# Altium PCB PlanerInductor2.PcbDoc
Units mil, origin at the board's own origin, x right, y up, seen from the top; angles counter-clockwise.
Board outline 6000 x 4000 mil, 6 copper layers (Top Layer, Mid-Layer 1, Mid-Layer 2, Mid-Layer 3, Mid-Layer 4, Bottom Layer); 19 components, 0 nets, 38 pads, 105 vias.
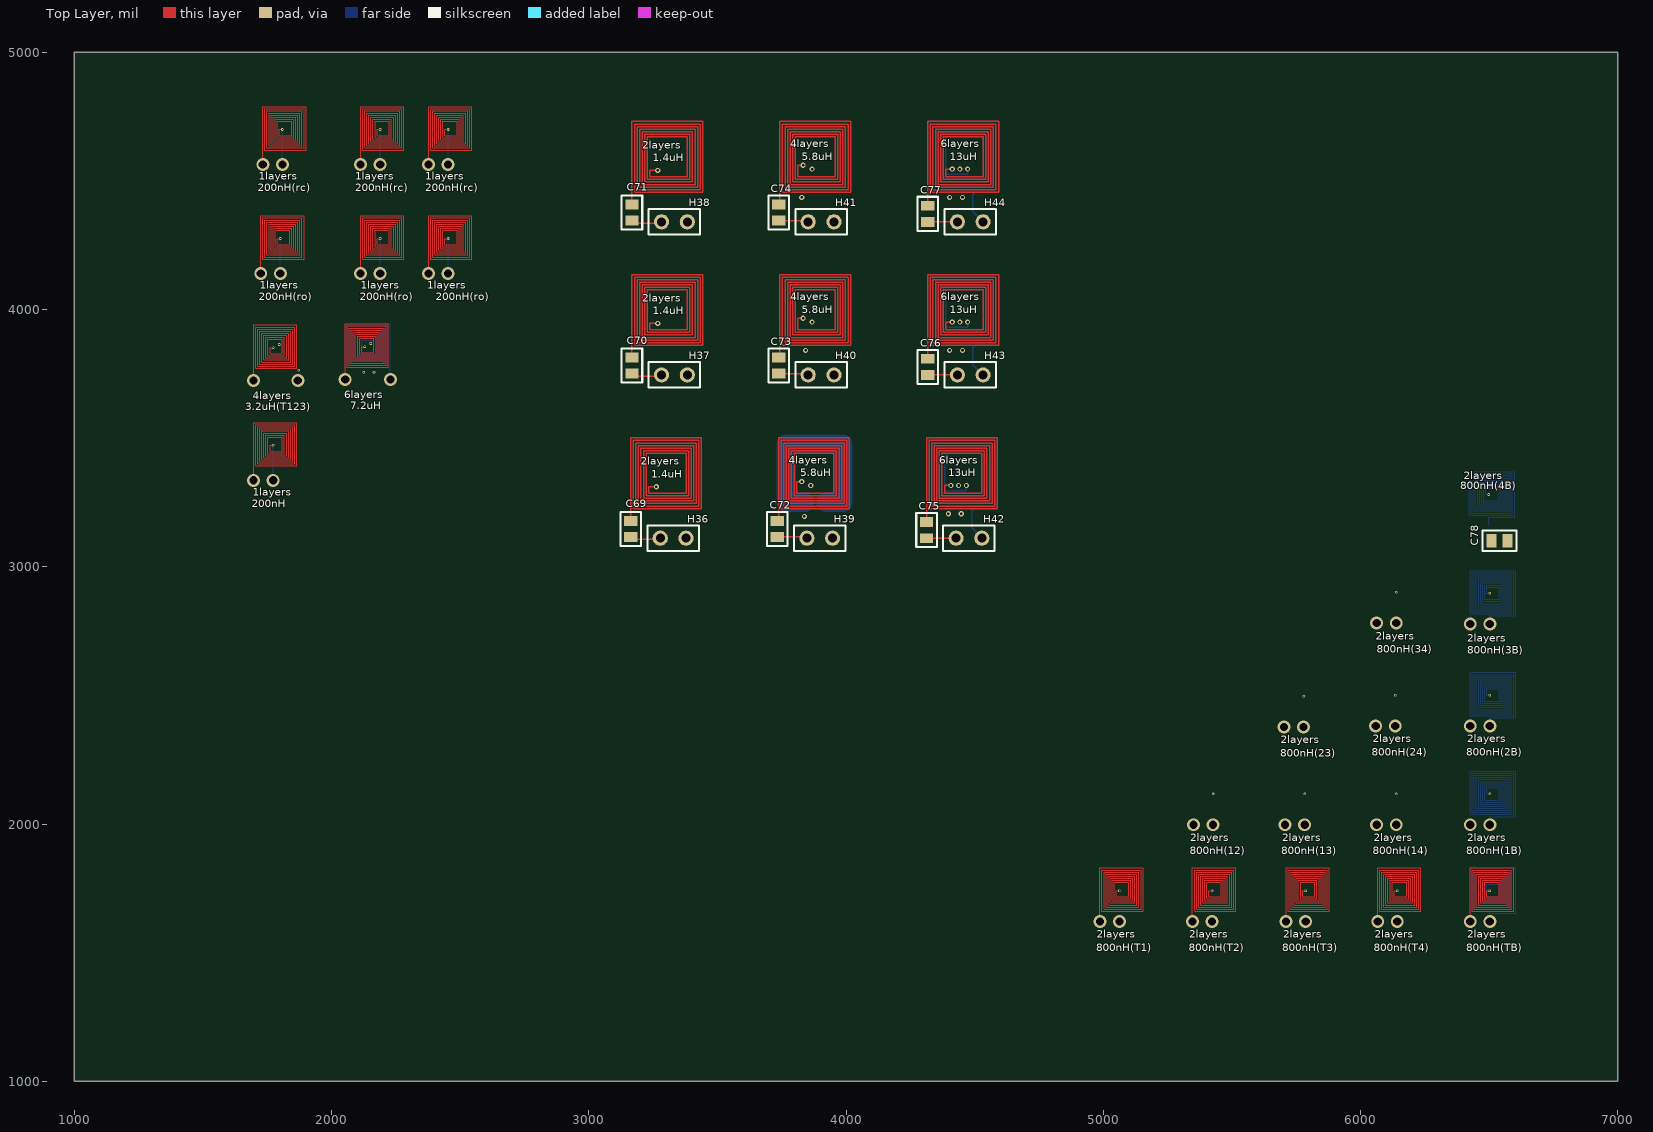
[diagram p0: Top Layer view]
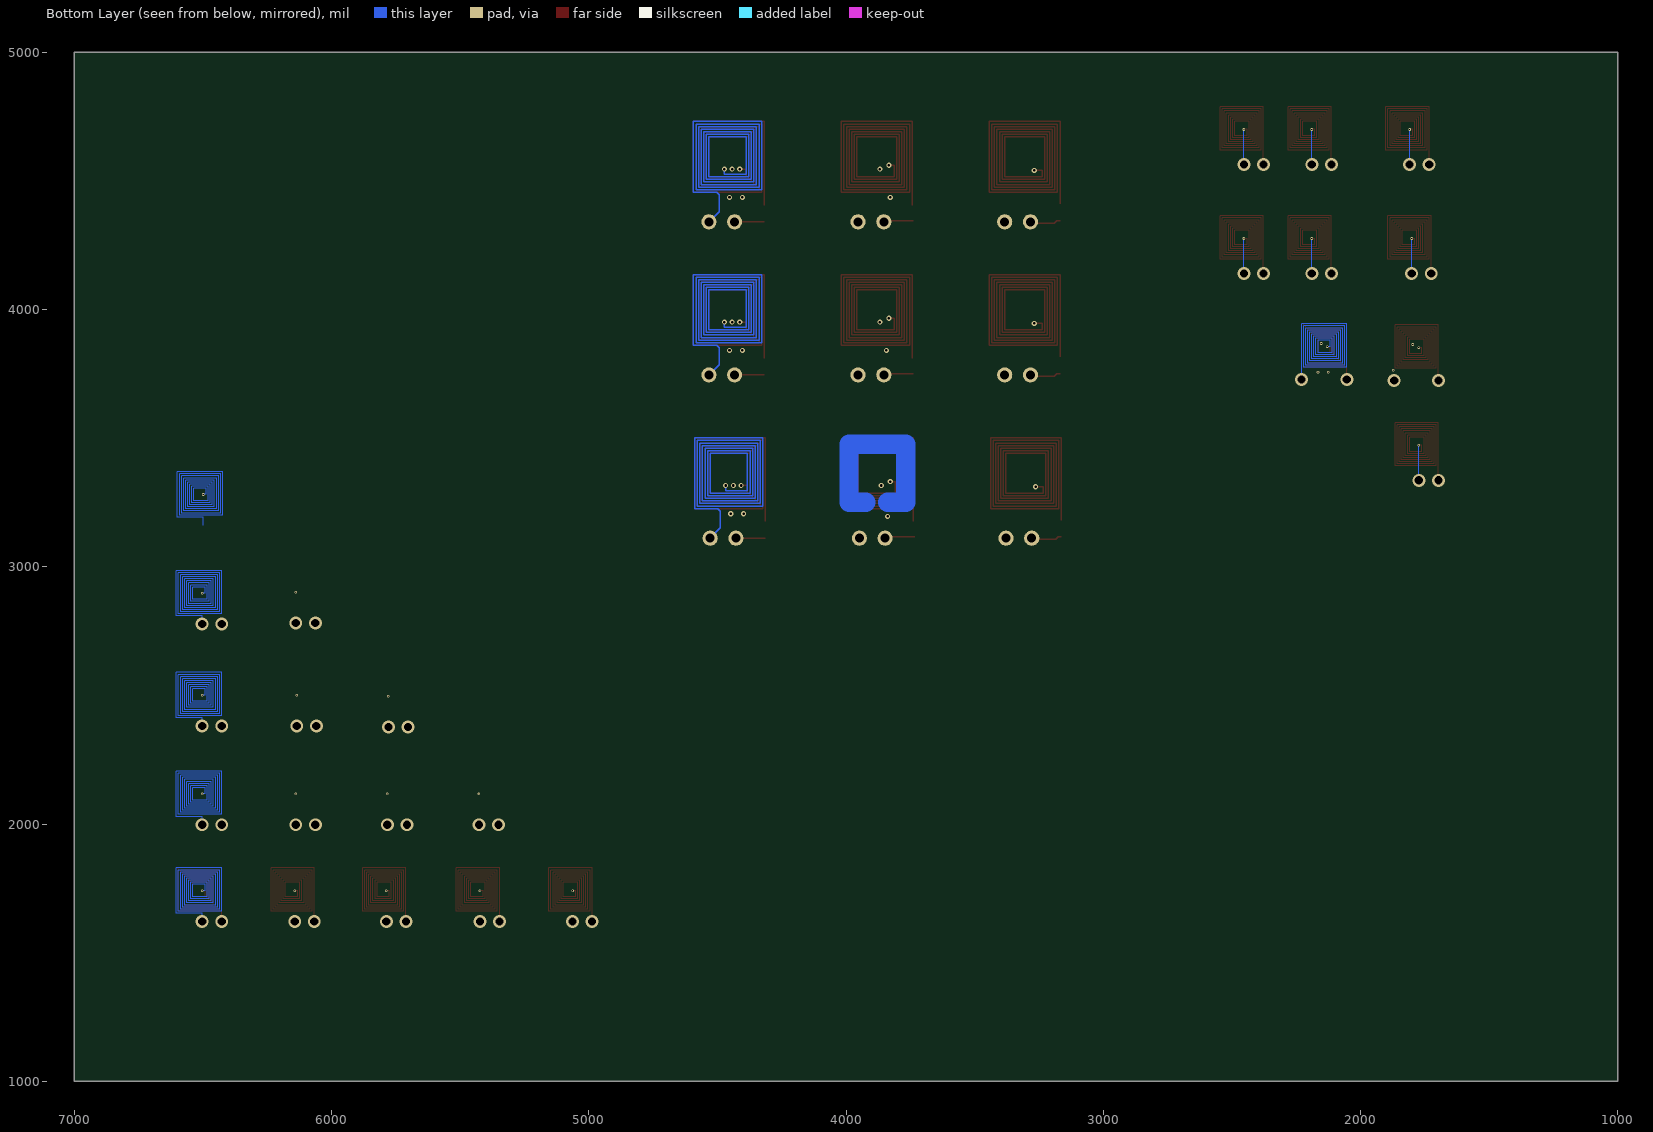
[diagram p1: Bottom Layer view, seen from below]
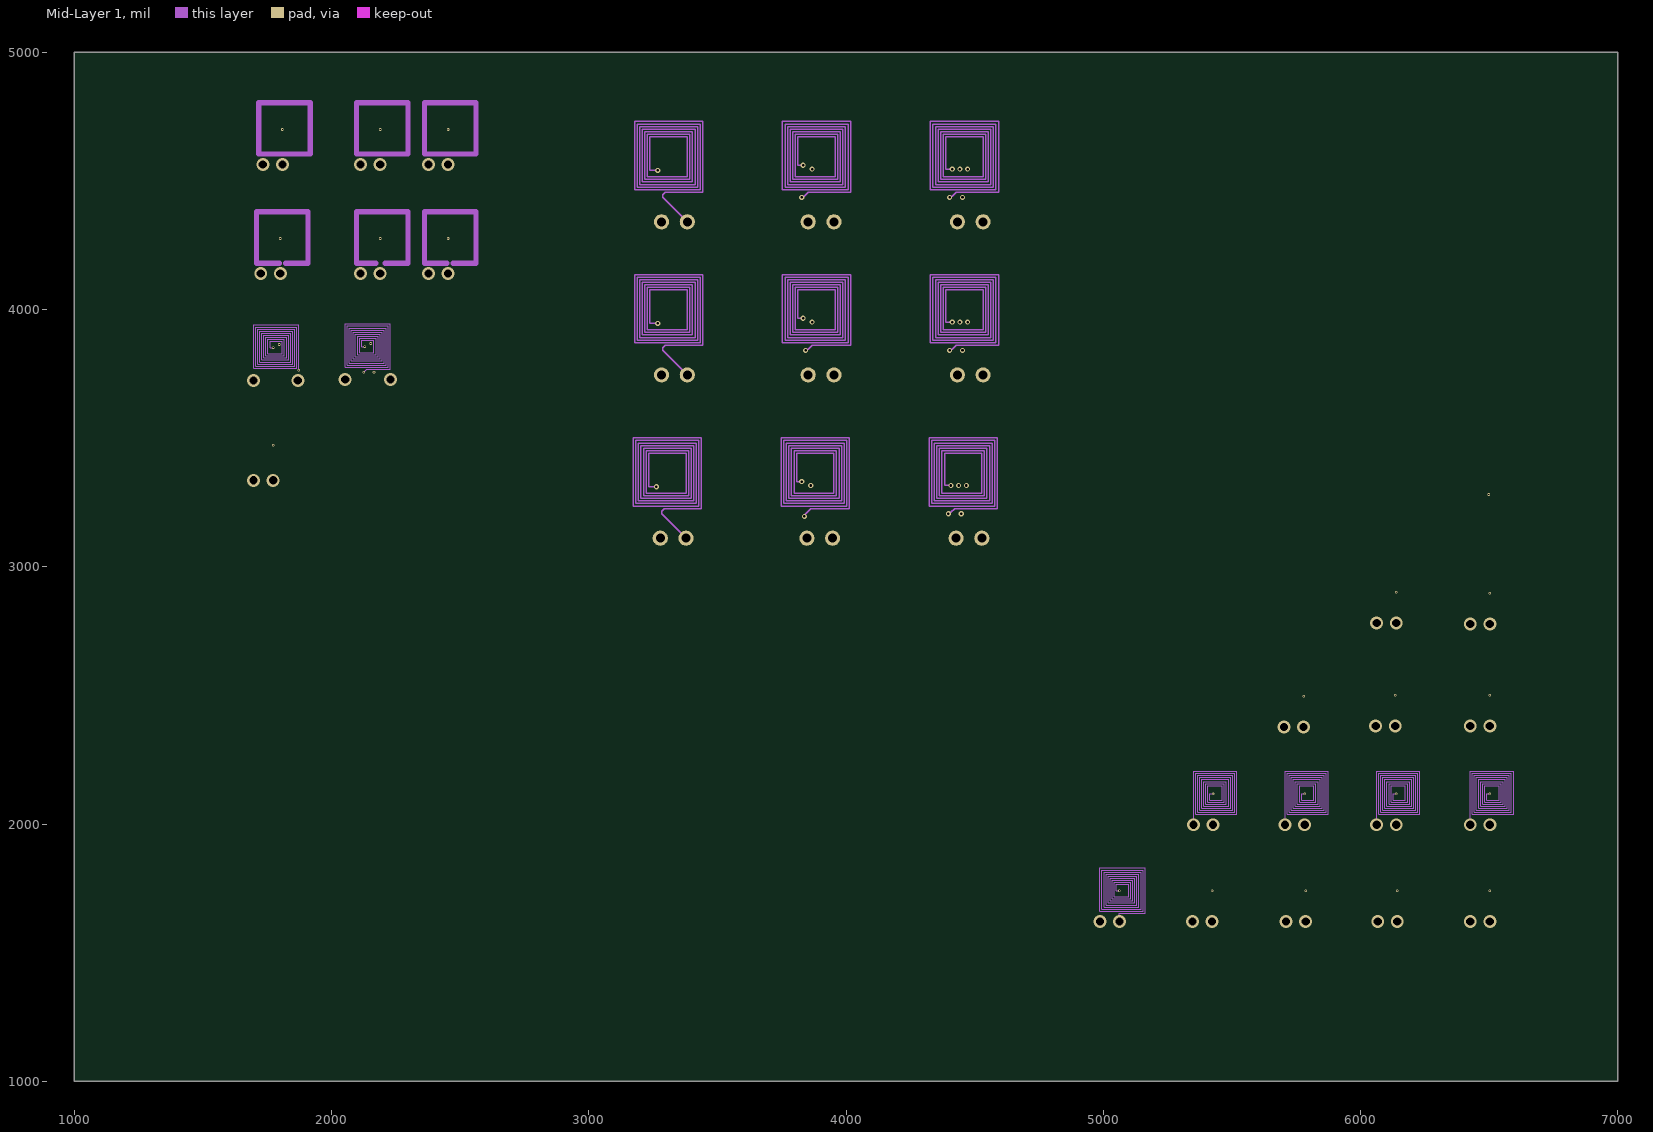
[diagram p2: Mid-Layer 1]
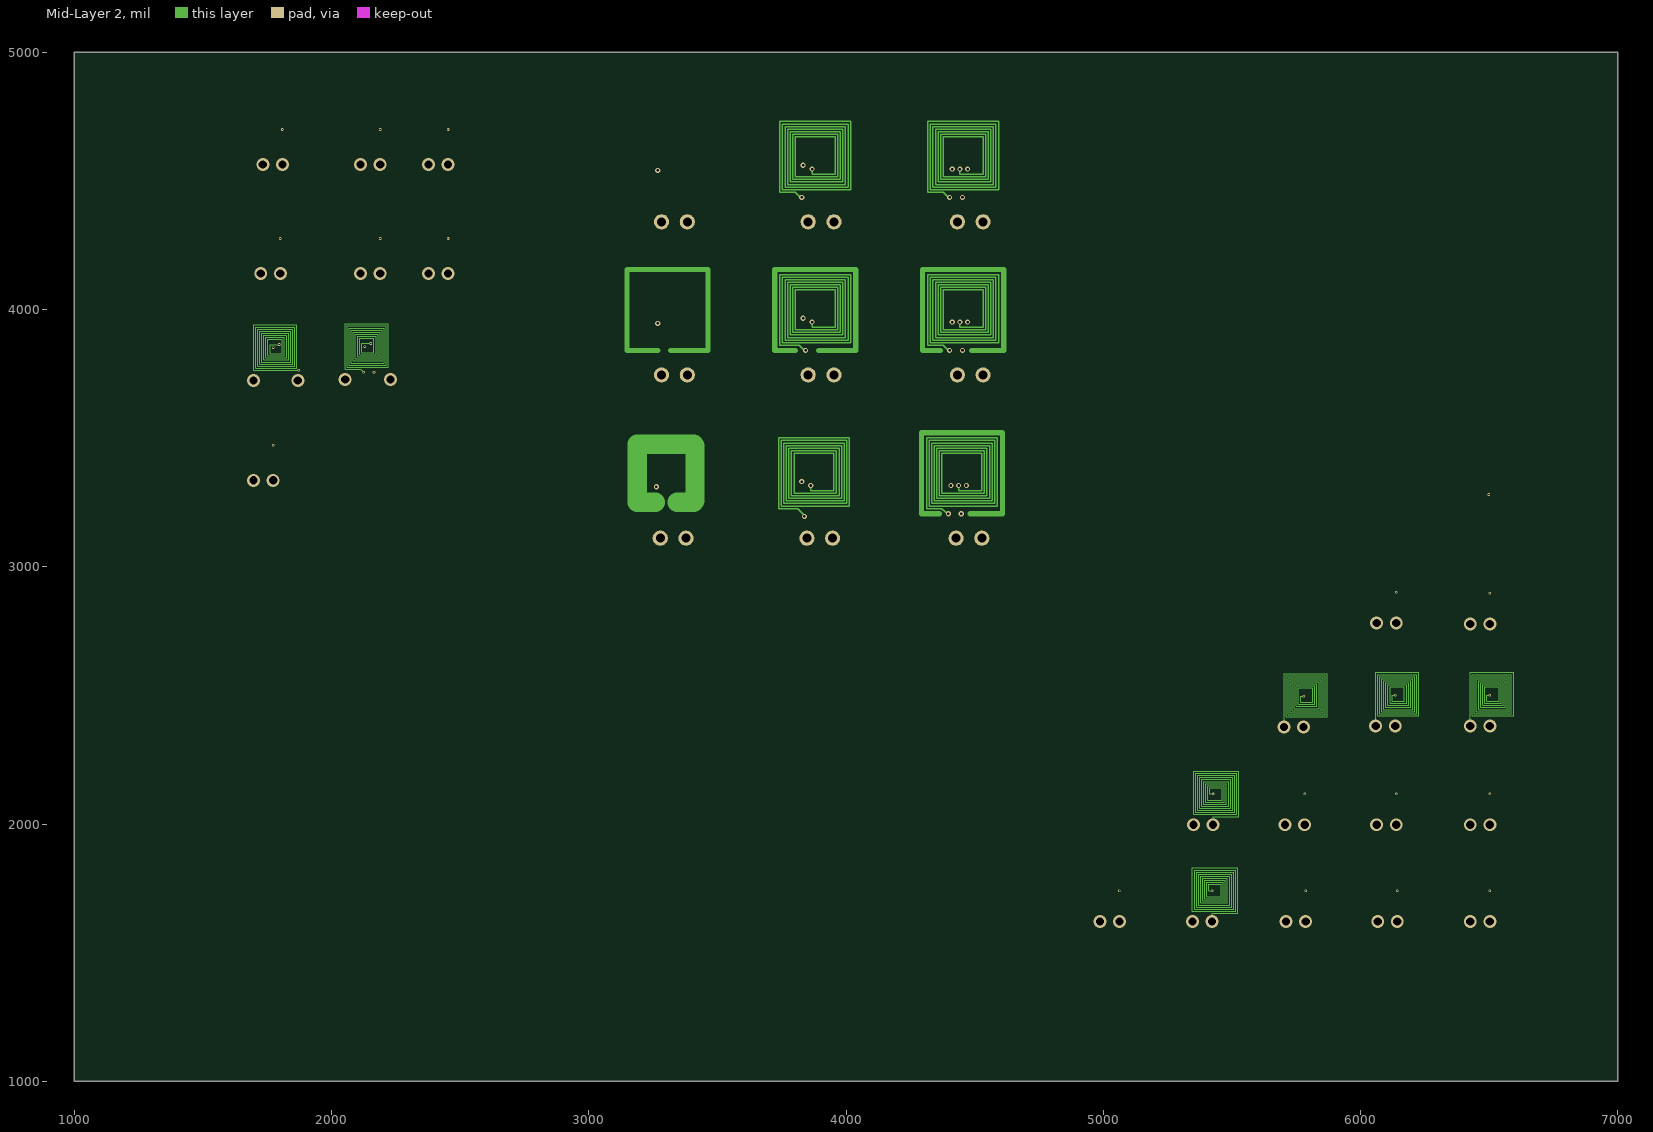
[diagram p3: Mid-Layer 2]
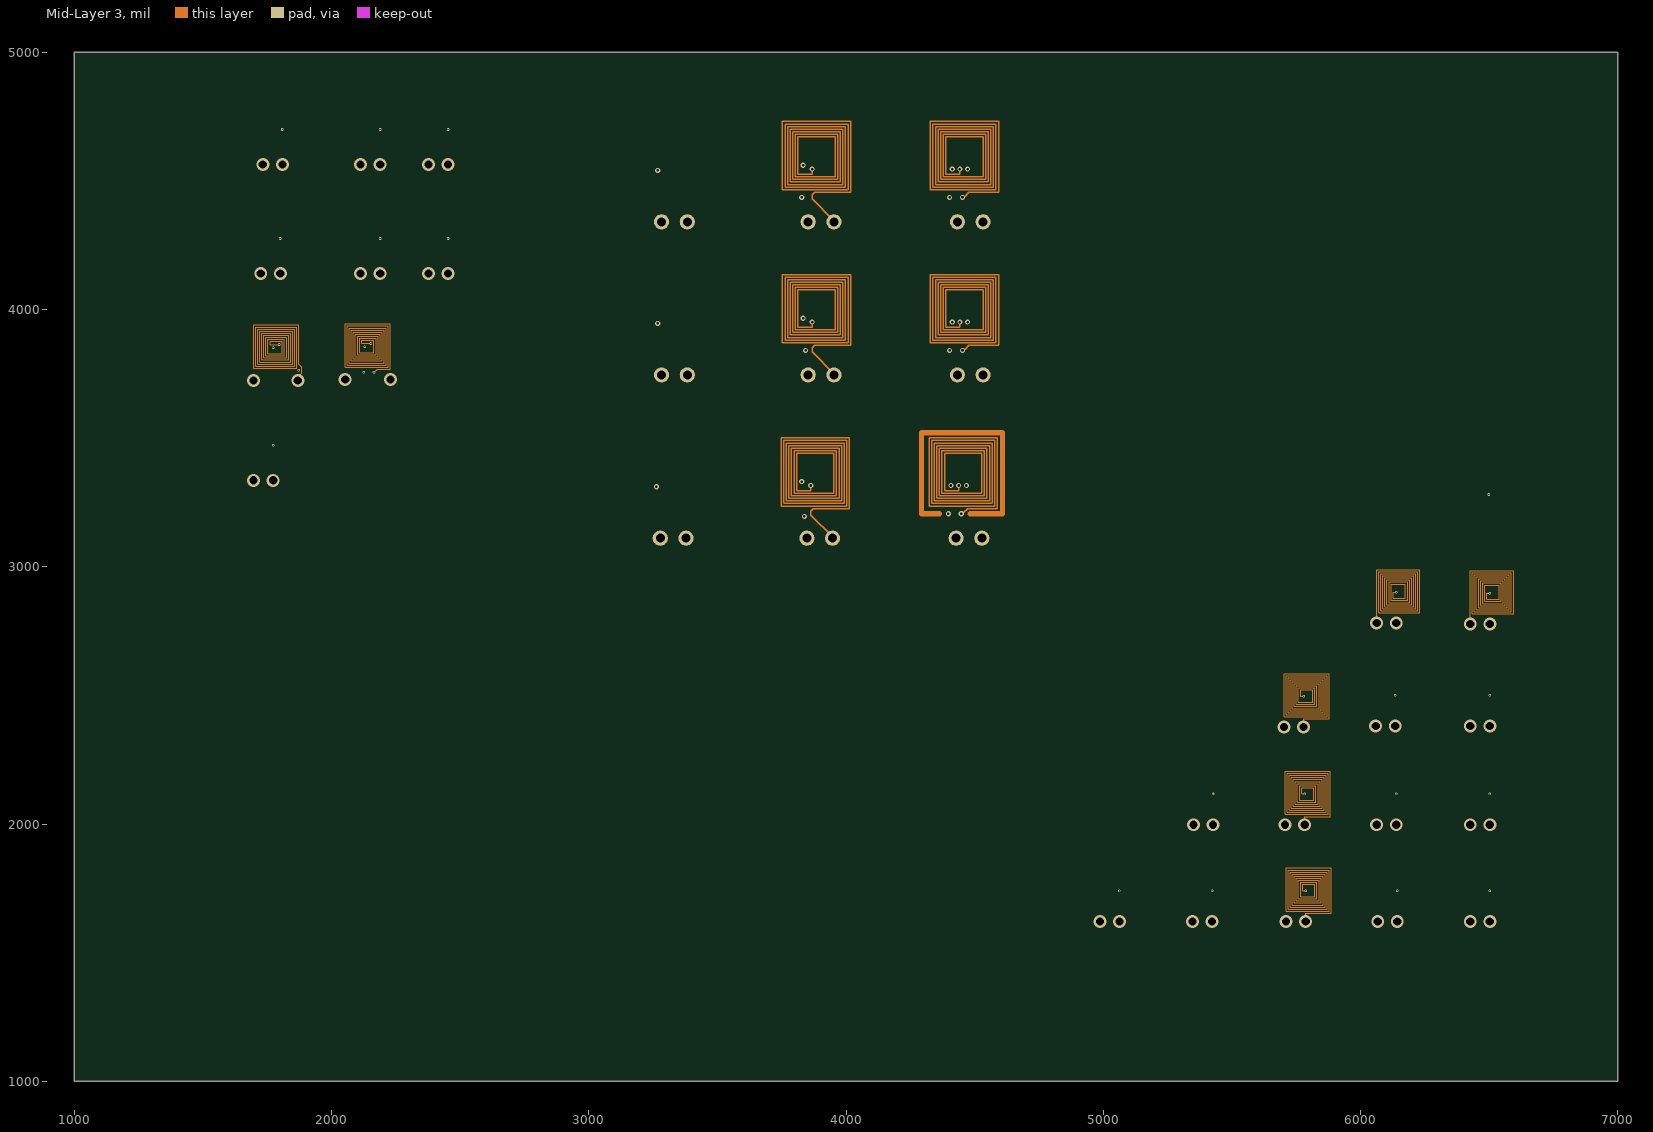
[diagram p4: Mid-Layer 3]
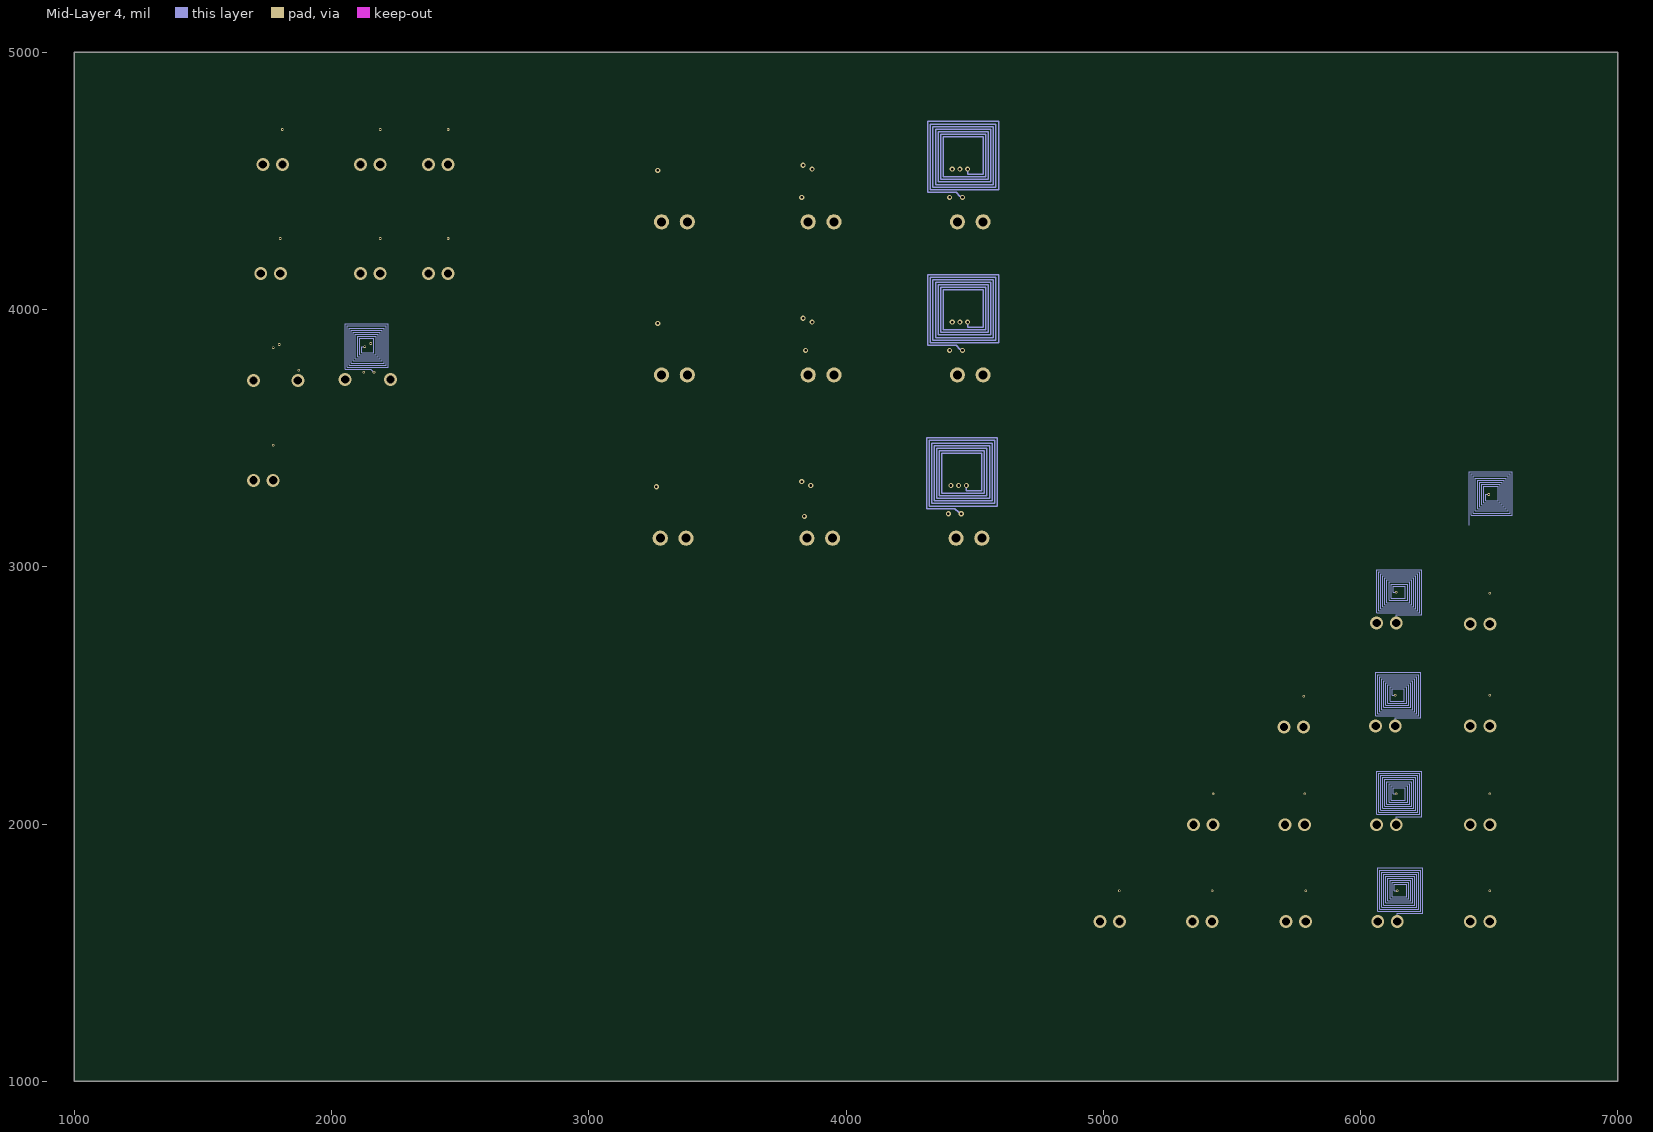
[diagram p5: Mid-Layer 4]

## Layer stack, top to bottom
Top Layer: signal copper 1.4
Dielectric: dielectric 12.6, FR-4, Dk 4.8
Mid-Layer 1: signal copper 1.4
Dielectric: dielectric 12.6, FR-4, Dk 4.8
Mid-Layer 2: signal copper 1.4
Dielectric: dielectric 12.6, FR-4, Dk 4.8
Mid-Layer 3: signal copper 1.4
Dielectric: dielectric 12.6, FR-4, Dk 4.8
Mid-Layer 4: signal copper 1.4
Dielectric: dielectric 12.6, FR-4, Dk 4.8
Bottom Layer: signal copper 1.4

## Board outline
1000,1000 7000,1000 7000,5000 1000,5000

## Design rules (kind name [scope] priority, off if disabled: settings)
Clearance [All] p1: gap=10
PolygonConnect [All] p1: connectstyle=Relief reliefconductorwidth=10 reliefentries=4 polygonreliefangle="90 Angle"
RoutingVias [All] p1: holewidth=28 width=50 viastyle="Through Hole" minholewidth=28 minwidth=50 maxholewidth=28 maxwidth=50
SilkscreenOverComponentPads [All] p1: minsilkscreentomaskgap=10
SolderMaskExpansion [All] p1: expansion=4
Width [All] p1: maxlimit=10 minlimit=10 preferedwidth=10
27 further rules are at their usual default settings.

## Components (designator, comment, footprint, x,y, rotation, side; value= is the part's Value field where it differs from the comment)
C69 "HPC" 0805 3163,3116 r90 top
C70 "HPC" 0805 3168,3751 r90 top
C71 "HPC" 0805 3168,4346 r90 top
C72 "HPC" 0805 3733,3116 r90 top
C73 "HPC" 0805 3738,3751 r90 top
C74 "HPC" 0805 3738,4346 r90 top
C75 "HPC" 0805 4313,3111 r90 top
C76 "HPC" 0805 4318,3746 r90 top
C77 "HPC" 0805 4318,4341 r90 top
C78 "HPC" 0805 6572,3101 r180 top
H36 "HPC" HDR1X2 3278,3111 r0 top
H37 "HPC" HDR1X2 3283,3746 r0 top
H38 "HPC" HDR1X2 3283,4341 r0 top
H39 "HPC" HDR1X2 3848,3111 r0 top
H40 "HPC" HDR1X2 3853,3746 r0 top
H41 "HPC" HDR1X2 3853,4341 r0 top
H42 "HPC" HDR1X2 4428,3111 r0 top
H43 "HPC" HDR1X2 4433,3746 r0 top
H44 "HPC" HDR1X2 4433,4341 r0 top

## Footprints (in the part's own frame and the unit in brackets; to place one, negate y for a bottom-side part, rotate by r counter-clockwise, add the part's x,y. Pads: shape width x height; smd on the part's side, far side on the other; paste and mask are expansions set on the pad)
0805 [mil]
  rect 38.5x52 smd: 1(0,0) 2(62.5,0)
  silkscreen extent -35,-40 98,40
HDR1X2 [mm]
  round 1.5 hole 0.889: 1(0,0) 2(2.54,0)
  silkscreen extent -1.27,-1.27 3.81,1.27

## Via types
v1: diameter 50, hole 32, Top Layer to Bottom Layer, 46 vias
v2: diameter 10, hole 5, Top Layer to Bottom Layer, 32 vias
v3: diameter 20, hole 10, Top Layer to Bottom Layer, 27 vias

## Nets (pads, with @x,y where several pads share a name; then routed paths per layer and width w, separated by ;. In a path a pad name is that pad's centre, name@x,y a point inside that pad or via, vN(x,y) a via of type N, cw(c..) or ccw(c..) an arc to the next point about the centre after c; other vN are vias at no path point)
pads on no net: C69.1 C69.2 C70.1 C70.2 C71.1 C71.2 C72.1 C72.2 C73.1 C73.2 C74.1 C74.2 C75.1 C75.2 C76.1 C76.2 C77.1 C77.2 C78.1 C78.2 H36.1 H36.2 H37.1 H37.2 H38.1 H38.2 H39.1 H39.2 H40.1 H40.2 H41.1 H41.2 H42.1 H42.2 H43.1 H43.2 H44.1 H44.2
copper on no net: | length 406958.9
  Top Layer w4: v1(1697,3336) 1697,3560 1865,3560 1865,3392 1705,3392 1705,3552 1857,3552 1857,3400 1713,3400 1713,3540 1713,3544 1849,3544 1849,3408 1721,3408 1721,3536 1841,3536 1841,3416 1729,3416 1729,3528 1833,3528 1833,3424 1737,3424 1737,3520 1825,3520 1825,3432 1745,3432 1745,3512 1817,3512 1817,3440 1753,3440 1753,3504 1809,3504 1809,3452 1809,3448 1761,3448 1761,3460 1761,3472 ; v1(1697,3724) 1697,3940 1865,3940 1865,3772 1705,3772 1705,3932 1857,3932 1857,3780 1713,3780 1713,3920 1713,3924 1849,3924 1849,3788 1721,3788 1721,3916 1841,3916 1841,3796 1729,3796 1729,3908 1833,3908 1833,3804 1737,3804 1737,3900 1825,3900 1825,3812 1745,3812 1745,3892 1817,3892 1817,3820 1753,3820 1753,3884 1809,3884 1809,3832 1809,3828 1761,3828 1761,3840 1761,3852 ; v1(1725,4140) 1725,4364 1893,4364 1893,4196 1733,4196 1733,4356 1885,4356 1885,4204 1741,4204 1741,4344 1741,4348 1877,4348 1877,4212 1749,4212 1749,4340 1869,4340 1869,4220 1757,4220 1757,4332 1861,4332 1861,4228 1765,4228 1765,4324 1853,4324 1853,4236 1773,4236 1773,4316 1845,4316 1845,4244 1781,4244 1781,4308 1837,4308 1837,4256 1837,4252 1789,4252 1789,4264 1789,4276 ; v1(1733,4564) 1733,4788 1901,4788 1901,4620 1741,4620 1741,4780 1893,4780 1893,4628 1749,4628 1749,4768 1749,4772 1885,4772 1885,4636 1757,4636 1757,4764 1877,4764 1877,4644 1765,4644 1765,4756 1869,4756 1869,4652 1773,4652 1773,4748 1861,4748 1861,4660 1781,4660 1781,4740 1853,4740 1853,4668 1789,4668 1789,4732 1845,4732 1845,4680 1845,4676 1797,4676 1797,4688 1797,4700 ; v1(2053,3728) 2053,3944 2221,3944 2221,3776 2061,3776 2061,3936 2213,3936 2213,3784 2069,3784 2069,3924 2069,3928 2205,3928 2205,3792 2077,3792 2077,3920 2197,3920 2197,3800 2085,3800 2085,3912 2189,3912 2189,3808 2093,3808 2093,3904 2181,3904 2181,3816 2101,3816 2101,3896 2173,3896 2173,3824 2109,3824 2109,3888 2165,3888 2165,3836 2165,3832 2117,3832 2117,3844 2117,3856 ; v1(2113,4140) 2113,4364 2281,4364 2281,4196 2121,4196 2121,4356 2273,4356 2273,4204 2129,4204 2129,4344 2129,4348 2265,4348 2265,4212 2137,4212 2137,4340 2257,4340 2257,4220 2145,4220 2145,4332 2249,4332 2249,4228 2153,4228 2153,4324 2241,4324 2241,4236 2161,4236 2161,4316 2233,4316 2233,4244 2169,4244 2169,4308 2225,4308 2225,4256 2225,4252 2177,4252 2177,4264 2177,4276 ; v1(2113,4564) 2113,4788 2281,4788 2281,4620 2121,4620 2121,4780 2273,4780 2273,4628 2129,4628 2129,4768 2129,4772 2265,4772 2265,4636 2137,4636 2137,4764 2257,4764 2257,4644 2145,4644 2145,4756 2249,4756 2249,4652 2153,4652 2153,4748 2241,4748 2241,4660 2161,4660 2161,4740 2233,4740 2233,4668 2169,4668 2169,4732 2225,4732 2225,4680 2225,4676 2177,4676 2177,4688 2177,4700 ; v1(2377,4140) 2377,4364 2545,4364 2545,4196 2385,4196 2385,4356 2537,4356 2537,4204 2393,4204 2393,4344 2393,4348 2529,4348 2529,4212 2401,4212 2401,4340 2521,4340 2521,4220 2409,4220 2409,4332 2513,4332 2513,4228 2417,4228 2417,4324 2505,4324 2505,4236 2425,4236 2425,4316 2497,4316 2497,4244 2433,4244 2433,4308 2489,4308 2489,4256 2489,4252 2441,4252 2441,4264 2441,4276 ; v1(2377,4564) 2377,4788 2545,4788 2545,4620 2385,4620 2385,4780 2537,4780 2537,4628 2393,4628 2393,4768 2393,4772 2529,4772 2529,4636 2401,4636 2401,4764 2521,4764 2521,4644 2409,4644 2409,4756 2513,4756 2513,4652 2417,4652 2417,4748 2505,4748 2505,4660 2425,4660 2425,4740 2497,4740 2497,4668 2433,4668 2433,4732 2489,4732 2489,4680 2489,4676 2441,4676 2441,4688 2441,4700 ; v1(4987,1621) 4987,1829 5155,1829 5155,1661 4995,1661 4995,1821 5147,1821 5147,1669 5003,1669 5003,1809 5003,1813 5139,1813 5139,1677 5011,1677 5011,1805 5131,1805 5131,1685 5019,1685 5019,1797 5123,1797 5123,1693 5027,1693 5027,1789 5115,1789 5115,1701 5035,1701 5035,1781 5107,1781 5107,1709 5043,1709 5043,1773 5099,1773 5099,1721 5099,1717 5051,1717 5051,1729 5051,1741 ; v1(5347,1621) 5347,1829 5515,1829 5515,1661 5355,1661 5355,1821 5507,1821 5507,1669 5363,1669 5363,1809 5363,1813 5499,1813 5499,1677 5371,1677 5371,1805 5491,1805 5491,1685 5379,1685 5379,1797 5483,1797 5483,1693 5387,1693 5387,1789 5475,1789 5475,1701 5395,1701 5395,1781 5467,1781 5467,1709 5403,1709 5403,1773 5459,1773 5459,1721 5459,1717 5411,1717 5411,1729 5411,1741 ; v1(5711,1621) 5711,1829 5879,1829 5879,1661 5719,1661 5719,1821 5871,1821 5871,1669 5727,1669 5727,1809 5727,1813 5863,1813 5863,1677 5735,1677 5735,1805 5855,1805 5855,1685 5743,1685 5743,1797 5847,1797 5847,1693 5751,1693 5751,1789 5839,1789 5839,1701 5759,1701 5759,1781 5831,1781 5831,1709 5767,1709 5767,1773 5823,1773 5823,1721 5823,1717 5775,1717 5775,1729 5775,1741 ; v1(6067,1621) 6067,1829 6235,1829 6235,1661 6075,1661 6075,1821 6227,1821 6227,1669 6083,1669 6083,1809 6083,1813 6219,1813 6219,1677 6091,1677 6091,1805 6211,1805 6211,1685 6099,1685 6099,1797 6203,1797 6203,1693 6107,1693 6107,1789 6195,1789 6195,1701 6115,1701 6115,1781 6187,1781 6187,1709 6123,1709 6123,1773 6179,1773 6179,1721 6179,1717 6131,1717 6131,1729 6131,1741 ; v1(6427,1621) 6427,1829 6595,1829 6595,1661 6435,1661 6435,1821 6587,1821 6587,1669 6443,1669 6443,1809 6443,1813 6579,1813 6579,1677 6451,1677 6451,1805 6571,1805 6571,1685 6459,1685 6459,1797 6563,1797 6563,1693 6467,1693 6467,1789 6555,1789 6555,1701 6475,1701 6475,1781 6547,1781 6547,1709 6483,1709 6483,1773 6539,1773 6539,1721 6539,1717 6491,1717 6491,1729 6491,1741 ; 1761,3472 v2@1769,3472 ; 1761,3472 v2@1769,3472 ; 1761,3472 v2@1769,3472 ; 1761,3852 v2@1769,3852 ; 1761,3852 v2@1769,3852 ; 1761,3852 v2@1769,3852 ; 1789,4276 v2@1797,4276 ; 1789,4276 v2@1797,4276 ; 1789,4276 v2@1797,4276 ; 1797,4700 v2@1805,4700 ; 1797,4700 v2@1805,4700 ; 1797,4700 v2@1805,4700 ; 2117,3856 v2@2125,3856 ; 2117,3856 v2@2125,3856 ; 2117,3856 v2@2125,3856 ; 2177,4276 v2@2185,4276 ; 2177,4276 v2@2185,4276 ; 2177,4276 v2@2185,4276 ; 2177,4700 v2@2185,4700 ; 2177,4700 v2@2185,4700 ; 2177,4700 v2@2185,4700 ; 2441,4276 v2@2449,4276 ; 2441,4276 v2@2449,4276 ; 2441,4276 v2@2449,4276 ; 2441,4700 v2@2449,4700 ; 2441,4700 v2@2449,4700 ; 2441,4700 v2@2449,4700 ; 5051,1741 v2@5059,1741 ; 5051,1741 v2@5059,1741 ; 5051,1741 v2@5059,1741 ; 5411,1741 v2@5419,1741 ; 5411,1741 v2@5419,1741 ; 5411,1741 v2@5419,1741 ; 5775,1741 v2@5783,1741 ; 5775,1741 v2@5783,1741 ; 5775,1741 v2@5783,1741 ; 6131,1741 v2@6139,1741 ; 6131,1741 v2@6139,1741 ; 6131,1741 v2@6139,1741 ; 6491,1741 v2@6499,1741 ; 6491,1741 v2@6499,1741 ; 6491,1741 v2@6499,1741
  Top Layer w5: 3163,3116 3175.27,3116 3185.27,3106 3198,3106 v2(3273,3106) 3278,3111 ; 3163,3181 3163,3226 3163,3501 3438,3501 3438,3226 3233,3226 3173,3226 3173,3491 3428,3491 3428,3236 3183,3236 3183,3481 3418,3481 3418,3246 3193,3246 3193,3471 3408,3471 3408,3256 3203,3256 3203,3461 3398,3461 3398,3266 3213,3266 3213,3451 3388,3451 3388,3276 3223,3276 3223,3441 3378,3441 3378,3286 3233,3286 3233,3311 v3(3263,3311) ; 3168,3751 3180.27,3751 3190.27,3741 3203,3741 v2(3278,3741) 3283,3746 ; 3168,3816 3168,3861 3168,4136 3443,4136 3443,3861 3238,3861 3178,3861 3178,4126 3433,4126 3433,3871 3188,3871 3188,4116 3423,4116 3423,3881 3198,3881 3198,4106 3413,4106 3413,3891 3208,3891 3208,4096 3403,4096 3403,3901 3218,3901 3218,4086 3393,4086 3393,3911 3228,3911 3228,4076 3383,4076 3383,3921 3238,3921 3238,3946 v3(3268,3946) ; 3168,4346 3180.27,4346 3190.27,4336 3203,4336 v2(3278,4336) 3283,4341 ; 3168,4411 3168,4456 3168,4731 3443,4731 3443,4456 3238,4456 3178,4456 3178,4721 3433,4721 3433,4466 3188,4466 3188,4711 3423,4711 3423,4476 3198,4476 3198,4701 3413,4701 3413,4486 3208,4486 3208,4691 3403,4691 3403,4496 3218,4496 3218,4681 3393,4681 3393,4506 3228,4506 3228,4671 3383,4671 3383,4516 3238,4516 3238,4541 v3(3268,4541) ; 3733,3116 3848,3116 ; 3738,3176 3738,3226 3738,3501 4013,3501 4013,3226 3808,3226 3748,3226 3748,3491 4003,3491 4003,3236 3758,3236 3758,3481 3993,3481 3993,3246 3768,3246 3768,3471 3983,3471 3983,3256 3778,3256 3778,3461 3973,3461 3973,3266 3788,3266 3788,3451 3963,3451 3963,3276 3798,3276 3798,3441 3953,3441 3953,3286 3808,3286 3808,3331 v3(3828,3331) ; 3738,3751 3853,3751 ; 3738,4346 3853,4346 ; 3743,3811 3743,3861 3743,4136 4018,4136 4018,3861 3813,3861 3753,3861 3753,4126 4008,4126 4008,3871 3763,3871 3763,4116 3998,4116 3998,3881 3773,3881 3773,4106 3988,4106 3988,3891 3783,3891 3783,4096 3978,4096 3978,3901 3793,3901 3793,4086 3968,4086 3968,3911 3803,3911 3803,4076 3958,4076 3958,3921 3813,3921 3813,3966 v3(3833,3966) ; 3743,4406 3743,4456 3743,4731 4018,4731 4018,4456 3813,4456 3753,4456 3753,4721 4008,4721 4008,4466 3763,4466 3763,4711 3998,4711 3998,4476 3773,4476 3773,4701 3988,4701 3988,4486 3783,4486 3783,4691 3978,4691 3978,4496 3793,4496 3793,4681 3968,4681 3968,4506 3803,4506 3803,4671 3958,4671 3958,4516 3813,4516 3813,4561 v3(3833,4561) ; 4313,3111 4428,3111 ; 4313,3176 4313,3226 4313,3501 4588,3501 4588,3226 4383,3226 4323,3226 4323,3491 4578,3491 4578,3236 4333,3236 4333,3481 4568,3481 4568,3246 4343,3246 4343,3471 4558,3471 4558,3256 4353,3256 4353,3461 4548,3461 4548,3266 4363,3266 4363,3451 4538,3451 4538,3276 4373,3276 4373,3441 4528,3441 4528,3286 4383,3286 4383,3316 v3(4408,3316) ; 4318,3746 4433,3746 ; 4318,3811 4318,3861 4318,4136 4593,4136 4593,3861 4388,3861 4328,3861 4328,4126 4583,4126 4583,3871 4338,3871 4338,4116 4573,4116 4573,3881 4348,3881 4348,4106 4563,4106 4563,3891 4358,3891 4358,4096 4553,4096 4553,3901 4368,3901 4368,4086 4543,4086 4543,3911 4378,3911 4378,4076 4533,4076 4533,3921 4388,3921 4388,3951 v3(4413,3951) ; 4318,4341 4433,4341 ; 4318,4406 4318,4456 4318,4731 4593,4731 4593,4456 4388,4456 4328,4456 4328,4721 4583,4721 4583,4466 4338,4466 4338,4711 4573,4711 4573,4476 4348,4476 4348,4701 4563,4701 4563,4486 4358,4486 4358,4691 4553,4691 4553,4496 4368,4496 4368,4681 4543,4681 4543,4506 4378,4506 4378,4671 4533,4671 4533,4516 4388,4516 4388,4546 v3(4413,4546)
  Mid-Layer 1 w4: v2(1773,3852) 1761,3852 1761,3876 1801,3876 1809,3876 1809,3828 1753,3828 1753,3884 1817,3884 1817,3820 1745,3820 1745,3892 1825,3892 1825,3812 1737,3812 1737,3900 1833,3900 1833,3804 1729,3804 1729,3908 1841,3908 1841,3796 1721,3796 1721,3916 1849,3916 1849,3788 1713,3788 1713,3924 1857,3924 1857,3780 1705,3780 1705,3932 1865,3932 1865,3772 1697,3772 1697,3940 1873,3940 v2(1873,3764) ; v2(2125,3756) 2137,3768 2229,3768 2229,3944 2053,3944 2053,3776 2221,3776 2221,3936 2061,3936 2061,3784 2213,3784 2213,3928 2069,3928 2069,3792 2205,3792 2205,3920 2077,3920 2077,3800 2197,3800 2197,3912 2085,3912 2085,3808 2189,3808 2189,3904 2093,3904 2093,3816 2181,3816 2181,3896 2101,3896 2101,3824 2173,3824 2173,3888 2109,3888 2109,3832 2165,3832 2165,3880 2157,3880 2117,3880 2117,3856 v2(2129,3856) ; v1(5063,1621) 5063,1653 5163,1653 5163,1829 4987,1829 4987,1661 5155,1661 5155,1821 4995,1821 4995,1669 5147,1669 5147,1813 5003,1813 5003,1677 5139,1677 5139,1805 5011,1805 5011,1685 5131,1685 5131,1797 5019,1797 5019,1693 5123,1693 5123,1789 5027,1789 5027,1701 5115,1701 5115,1781 5035,1781 5035,1709 5107,1709 5107,1773 5043,1773 5043,1717 5099,1717 5099,1765 5091,1765 5051,1765 5051,1741 v2(5063,1741) ; v1(5351,1997) 5351,2205 5519,2205 5519,2037 5359,2037 5359,2197 5511,2197 5511,2045 5367,2045 5367,2185 5367,2189 5503,2189 5503,2053 5375,2053 5375,2181 5495,2181 5495,2061 5383,2061 5383,2173 5487,2173 5487,2069 5391,2069 5391,2165 5479,2165 5479,2077 5399,2077 5399,2157 5471,2157 5471,2085 5407,2085 5407,2149 5463,2149 5463,2097 5463,2093 5415,2093 5415,2105 5415,2117 ; v1(5707,1997) 5707,2205 5875,2205 5875,2037 5715,2037 5715,2197 5867,2197 5867,2045 5723,2045 5723,2185 5723,2189 5859,2189 5859,2053 5731,2053 5731,2181 5851,2181 5851,2061 5739,2061 5739,2173 5843,2173 5843,2069 5747,2069 5747,2165 5835,2165 5835,2077 5755,2077 5755,2157 5827,2157 5827,2085 5763,2085 5763,2149 5819,2149 5819,2097 5819,2093 5771,2093 5771,2105 5771,2117 ; v1(6063,1997) 6063,2205 6231,2205 6231,2037 6071,2037 6071,2197 6223,2197 6223,2045 6079,2045 6079,2185 6079,2189 6215,2189 6215,2053 6087,2053 6087,2181 6207,2181 6207,2061 6095,2061 6095,2173 6199,2173 6199,2069 6103,2069 6103,2165 6191,2165 6191,2077 6111,2077 6111,2157 6183,2157 6183,2085 6119,2085 6119,2149 6175,2149 6175,2097 6175,2093 6127,2093 6127,2105 6127,2117 ; v1(6427,1997) 6427,2205 6595,2205 6595,2037 6435,2037 6435,2197 6587,2197 6587,2045 6443,2045 6443,2185 6443,2189 6579,2189 6579,2053 6451,2053 6451,2181 6571,2181 6571,2061 6459,2061 6459,2173 6563,2173 6563,2069 6467,2069 6467,2165 6555,2165 6555,2077 6475,2077 6475,2157 6547,2157 6547,2085 6483,2085 6483,2149 6539,2149 6539,2097 6539,2093 6491,2093 6491,2105 6491,2117 ; 5415,2117 v2@5423,2117 ; 5415,2117 v2@5423,2117 ; 5415,2117 v2@5423,2117 ; 5771,2117 v2@5779,2117 ; 5771,2117 v2@5779,2117 ; 5771,2117 v2@5779,2117 ; 6127,2117 v2@6135,2117 ; 6127,2117 v2@6135,2117 ; 6127,2117 v2@6135,2117 ; 6491,2117 v2@6499,2117 ; 6491,2117 v2@6499,2117 ; 6491,2117 v2@6499,2117
  Mid-Layer 1 w5: v3(3263,3311) 3233,3311 3233,3441 3378,3441 3378,3286 3223,3286 3223,3451 3388,3451 3388,3276 3213,3276 3213,3461 3398,3461 3398,3266 3203,3266 3203,3471 3408,3471 3408,3256 3193,3256 3193,3481 3418,3481 3418,3246 3183,3246 3183,3491 3428,3491 3428,3236 3173,3236 3173,3501 3438,3501 3438,3226 3293,3226 3283,3216 3283,3206 3378,3111 3378,3121 ; v3(3268,3946) 3238,3946 3238,4076 3383,4076 3383,3921 3228,3921 3228,4086 3393,4086 3393,3911 3218,3911 3218,4096 3403,4096 3403,3901 3208,3901 3208,4106 3413,4106 3413,3891 3198,3891 3198,4116 3423,4116 3423,3881 3188,3881 3188,4126 3433,4126 3433,3871 3178,3871 3178,4136 3443,4136 3443,3861 3298,3861 3288,3851 3288,3841 3383,3746 3383,3756 ; v3(3268,4541) 3238,4541 3238,4671 3383,4671 3383,4516 3228,4516 3228,4681 3393,4681 3393,4506 3218,4506 3218,4691 3403,4691 3403,4496 3208,4496 3208,4701 3413,4701 3413,4486 3198,4486 3198,4711 3423,4711 3423,4476 3188,4476 3188,4721 3433,4721 3433,4466 3178,4466 3178,4731 3443,4731 3443,4456 3298,4456 3288,4446 3288,4436 3383,4341 3383,4351 ; v3(3828,3331) 3808,3331 3808,3441 3953,3441 3953,3286 3798,3286 3798,3451 3963,3451 3963,3276 3788,3276 3788,3461 3973,3461 3973,3266 3778,3266 3778,3471 3983,3471 3983,3256 3768,3256 3768,3481 3993,3481 3993,3246 3758,3246 3758,3491 4003,3491 4003,3236 3748,3236 3748,3501 4013,3501 4013,3226 3913,3226 3863,3226 v3@3838,3201 ; v3@3828,4441 3838,4441 3853,4456 3918,4456 4018,4456 4018,4731 3753,4731 3753,4466 4008,4466 4008,4721 3763,4721 3763,4476 3998,4476 3998,4711 3773,4711 3773,4486 3988,4486 3988,4701 3783,4701 3783,4496 3978,4496 3978,4691 3793,4691 3793,4506 3968,4506 3968,4681 3803,4681 3803,4516 3958,4516 3958,4671 3813,4671 3813,4561 v3(3833,4561) ; v3(3833,3966) 3813,3966 3813,4076 3958,4076 3958,3921 3803,3921 3803,4086 3968,4086 3968,3911 3793,3911 3793,4096 3978,4096 3978,3901 3783,3901 3783,4106 3988,4106 3988,3891 3773,3891 3773,4116 3998,4116 3998,3881 3763,3881 3763,4126 4008,4126 4008,3871 3753,3871 3753,4136 4018,4136 4018,3861 3918,3861 3868,3861 3853,3846 v3@3843,3846 ; v3(4398,3206) 4403,3211 4408,3211 4423,3226 4488,3226 4588,3226 4588,3501 4323,3501 4323,3236 4578,3236 4578,3491 4333,3491 4333,3246 4568,3246 4568,3481 4343,3481 4343,3256 4558,3256 4558,3471 4353,3471 4353,3266 4548,3266 4548,3461 4363,3461 4363,3276 4538,3276 4538,3451 4373,3451 4373,3286 4528,3286 4528,3441 4383,3441 4383,3316 v3(4408,3316) ; v3(4403,3841) 4408,3846 4413,3846 4428,3861 4493,3861 4593,3861 4593,4136 4328,4136 4328,3871 4583,3871 4583,4126 4338,4126 4338,3881 4573,3881 4573,4116 4348,4116 4348,3891 4563,3891 4563,4106 4358,4106 4358,3901 4553,3901 4553,4096 4368,4096 4368,3911 4543,3911 4543,4086 4378,4086 4378,3921 4533,3921 4533,4076 4388,4076 4388,3951 v3(4413,3951) ; v3(4403,4436) 4408,4441 4413,4441 4428,4456 4493,4456 4593,4456 4593,4731 4328,4731 4328,4466 4583,4466 4583,4721 4338,4721 4338,4476 4573,4476 4573,4711 4348,4711 4348,4486 4563,4486 4563,4701 4358,4701 4358,4496 4553,4496 4553,4691 4368,4691 4368,4506 4543,4506 4543,4681 4378,4681 4378,4516 4533,4516 4533,4671 4388,4671 4388,4546 v3(4413,4546)
  Mid-Layer 1 w20: 1797,4180 1709,4180 1709,4368 1709,4372 1709,4376 1709,4380 1901,4380 1909,4380 1909,4184 1909,4180 1821,4180 ; 2173,4180 2097,4180 2097,4368 2097,4372 2097,4376 2097,4380 2289,4380 2297,4380 2297,4184 2297,4180 2208,4180 ; 2449,4180 2361,4180 2361,4368 2361,4372 2361,4376 2361,4380 2553,4380 2561,4380 2561,4184 2561,4180 2473,4180 ; 1717,4604 1829,4604 1917,4604 1917,4608 1917,4804 1909,4804 1717,4804 1717,4800 1717,4796 1717,4792 1717,4604 ; 2097,4604 2097,4792 2097,4796 2097,4800 2097,4804 2289,4804 2297,4804 2297,4608 2297,4604 2209,4604 2097,4604 ; 2361,4604 2361,4792 2361,4796 2361,4800 2361,4804 2553,4804 2561,4804 2561,4608 2561,4604 2473,4604 2361,4604
  Mid-Layer 2 w4: v2(1797,3864) 1789,3864 1761,3864 1761,3840 1761,3828 1809,3828 1809,3832 1809,3884 1753,3884 1753,3820 1817,3820 1817,3892 1745,3892 1745,3812 1825,3812 1825,3900 1737,3900 1737,3804 1833,3804 1833,3908 1729,3908 1729,3796 1841,3796 1841,3916 1721,3916 1721,3788 1849,3788 1849,3924 1713,3924 1713,3920 1713,3780 1857,3780 1857,3932 1705,3932 1705,3772 1865,3772 1865,3940 1697,3940 1697,3764 v2(1873,3764) ; v2(2125,3756) 2113,3768 2109,3768 2053,3768 2053,3944 2221,3944 2221,3776 2061,3776 2061,3936 2213,3936 2213,3784 2069,3784 2069,3924 2069,3928 2205,3928 2205,3792 2077,3792 2077,3920 2197,3920 2197,3800 2085,3800 2085,3912 2189,3912 2189,3808 2093,3808 2093,3904 2181,3904 2181,3816 2101,3816 2101,3896 2173,3896 2173,3824 2109,3824 2109,3888 2165,3888 2165,3836 2165,3832 2117,3832 2117,3844 2117,3868 2145,3868 v2(2153,3868) ; v1(5423,1621) 5423,1653 5523,1653 5523,1829 5347,1829 5347,1661 5515,1661 5515,1821 5355,1821 5355,1669 5507,1669 5507,1813 5363,1813 5363,1677 5499,1677 5499,1805 5371,1805 5371,1685 5491,1685 5491,1797 5379,1797 5379,1693 5483,1693 5483,1789 5387,1789 5387,1701 5475,1701 5475,1781 5395,1781 5395,1709 5467,1709 5467,1773 5403,1773 5403,1717 5459,1717 5459,1765 5451,1765 5411,1765 5411,1741 v2(5423,1741) ; v1(5427,1997) 5427,2029 5527,2029 5527,2205 5351,2205 5351,2037 5519,2037 5519,2197 5359,2197 5359,2045 5511,2045 5511,2189 5367,2189 5367,2053 5503,2053 5503,2181 5375,2181 5375,2061 5495,2061 5495,2173 5383,2173 5383,2069 5487,2069 5487,2165 5391,2165 5391,2077 5479,2077 5479,2157 5399,2157 5399,2085 5471,2085 5471,2149 5407,2149 5407,2093 5463,2093 5463,2141 5455,2141 5415,2141 5415,2117 v2(5427,2117) ; v1(5703,2377) 5703,2585 5871,2585 5871,2417 5711,2417 5711,2577 5863,2577 5863,2425 5719,2425 5719,2565 5719,2569 5855,2569 5855,2433 5727,2433 5727,2561 5847,2561 5847,2441 5735,2441 5735,2553 5839,2553 5839,2449 5743,2449 5743,2545 5831,2545 5831,2457 5751,2457 5751,2537 5823,2537 5823,2465 5759,2465 5759,2529 5815,2529 5815,2477 5815,2473 5767,2473 5767,2485 5767,2497 ; v1(6059,2381) 6059,2589 6227,2589 6227,2421 6067,2421 6067,2581 6219,2581 6219,2429 6075,2429 6075,2569 6075,2573 6211,2573 6211,2437 6083,2437 6083,2565 6203,2565 6203,2445 6091,2445 6091,2557 6195,2557 6195,2453 6099,2453 6099,2549 6187,2549 6187,2461 6107,2461 6107,2541 6179,2541 6179,2469 6115,2469 6115,2533 6171,2533 6171,2481 6171,2477 6123,2477 6123,2489 6123,2501 ; v1(6427,2381) 6427,2589 6595,2589 6595,2421 6435,2421 6435,2581 6587,2581 6587,2429 6443,2429 6443,2569 6443,2573 6579,2573 6579,2437 6451,2437 6451,2565 6571,2565 6571,2445 6459,2445 6459,2557 6563,2557 6563,2453 6467,2453 6467,2549 6555,2549 6555,2461 6475,2461 6475,2541 6547,2541 6547,2469 6483,2469 6483,2533 6539,2533 6539,2481 6539,2477 6491,2477 6491,2489 6491,2501 ; 5767,2497 v2@5775,2497 ; 5767,2497 v2@5775,2497 ; 5767,2497 v2@5775,2497 ; 6123,2501 v2@6131,2501 ; 6123,2501 v2@6131,2501 ; 6123,2501 v2@6131,2501 ; 6491,2501 v2@6499,2501 ; 6491,2501 v2@6499,2501 ; 6491,2501 v2@6499,2501
  Mid-Layer 2 w5: v3@3828,4441 3818,4441 3803,4456 3743,4456 3743,4731 4018,4731 4018,4466 3753,4466 3753,4721 4008,4721 4008,4476 3763,4476 3763,4711 3998,4711 3998,4486 3773,4486 3773,4701 3988,4701 3988,4496 3783,4496 3783,4691 3978,4691 3978,4506 3793,4506 3793,4681 3968,4681 3968,4516 3803,4516 3803,4671 3958,4671 3958,4526 3868,4526 v3(3868,4546) ; v3@3840.5,3198.5 3813,3226 3738,3226 3738,3501 4013,3501 4013,3236 3748,3236 3748,3491 4003,3491 4003,3246 3758,3246 3758,3481 3993,3481 3993,3256 3768,3256 3768,3471 3983,3471 3983,3266 3778,3266 3778,3461 3973,3461 3973,3276 3788,3276 3788,3451 3963,3451 3963,3286 3798,3286 3798,3441 3953,3441 3953,3296 3863,3296 v3(3863,3316) ; v3@3843,3846 3833,3846 3818,3861 3743,3861 3743,4136 4018,4136 4018,3871 3753,3871 3753,4126 4008,4126 4008,3881 3763,3881 3763,4116 3998,4116 3998,3891 3773,3891 3773,4106 3988,4106 3988,3901 3783,3901 3783,4096 3978,4096 3978,3911 3793,3911 3793,4086 3968,4086 3968,3921 3803,3921 3803,4076 3958,4076 3958,3931 3868,3931 v3(3868,3951) ; v3@4398,3211 4388,3211 4373,3226 4313,3226 4313,3501 4588,3501 4588,3236 4323,3236 4323,3491 4578,3491 4578,3246 4333,3246 4333,3481 4568,3481 4568,3256 4343,3256 4343,3471 4558,3471 4558,3266 4353,3266 4353,3461 4548,3461 4548,3276 4363,3276 4363,3451 4538,3451 4538,3286 4373,3286 4373,3441 4528,3441 4528,3296 4438,3296 v3(4438,3316) ; v3@4403,3846 4393,3846 4378,3861 4318,3861 4318,4136 4593,4136 4593,3871 4328,3871 4328,4126 4583,4126 4583,3881 4338,3881 4338,4116 4573,4116 4573,3891 4348,3891 4348,4106 4563,4106 4563,3901 4358,3901 4358,4096 4553,4096 4553,3911 4368,3911 4368,4086 4543,4086 4543,3921 4378,3921 4378,4076 4533,4076 4533,3931 4443,3931 v3(4443,3951) ; v3@4403,4441 4393,4441 4378,4456 4318,4456 4318,4731 4593,4731 4593,4466 4328,4466 4328,4721 4583,4721 4583,4476 4338,4476 4338,4711 4573,4711 4573,4486 4348,4486 4348,4701 4563,4701 4563,4496 4358,4496 4358,4691 4553,4691 4553,4506 4368,4506 4368,4681 4543,4681 4543,4516 4378,4516 4378,4671 4533,4671 4533,4526 4443,4526 v3(4443,4546)
  Mid-Layer 2 w20: 3268,3841 3148,3841 3148,4151 3148,4156 3453,4156 3463,4156 3463,3846 ; 3318,3841 3463,3841 ; 3723,4151 3723,3841 3803,3841 ; 3723,4156 4038,4156 4038,3846 ; 3893,3841 4038,3841 ; 4293,3516 4293,3206 4363,3206 ; 4293,3521 4608,3521 4608,3211 ; 4298,4151 4298,3841 4368,3841 ; 4298,4156 4613,4156 4613,3846 ; 4483,3206 4608,3206 ; 4488,3841 4613,3841
  Mid-Layer 2 w75: 3188,3471 3188,3251 3258,3251 ; 3188,3476 3408,3476 ; 3343,3251 3408,3251 ; 3413,3256 3413,3471
  Mid-Layer 3 w4: v2(1797,3864) 1761,3864 1761,3876 1801,3876 1809,3876 1809,3828 1753,3828 1753,3884 1817,3884 1817,3820 1745,3820 1745,3892 1825,3892 1825,3812 1737,3812 1737,3900 1833,3900 1833,3804 1729,3804 1729,3908 1841,3908 1841,3796 1721,3796 1721,3916 1849,3916 1849,3788 1713,3788 1713,3924 1857,3924 1857,3780 1705,3780 1705,3932 1865,3932 1865,3772 1697,3772 1697,3940 1873,3940 1873,3788 ; v1(1869,3724) 1869,3736 1885,3752 1885,3776 1873,3788 ; 1873,3792 1873,3788 ; v2(2153,3868) 2117,3868 2117,3880 2157,3880 2165,3880 2165,3832 2109,3832 2109,3888 2173,3888 2173,3824 2101,3824 2101,3896 2181,3896 2181,3816 2093,3816 2093,3904 2189,3904 2189,3808 2085,3808 2085,3912 2197,3912 2197,3800 2077,3800 2077,3920 2205,3920 2205,3792 2069,3792 2069,3928 2213,3928 2213,3784 2061,3784 2061,3936 2221,3936 2221,3776 2053,3776 2053,3944 2229,3944 2229,3792 ; v2(2165,3756) 2177,3768 2229,3768 2229,3792 ; 2229,3796 2229,3792 ; v1(5779,2377) 5779,2409 5879,2409 5879,2585 5703,2585 5703,2417 5871,2417 5871,2577 5711,2577 5711,2425 5863,2425 5863,2569 5719,2569 5719,2433 5855,2433 5855,2561 5727,2561 5727,2441 5847,2441 5847,2553 5735,2553 5735,2449 5839,2449 5839,2545 5743,2545 5743,2457 5831,2457 5831,2537 5751,2537 5751,2465 5823,2465 5823,2529 5759,2529 5759,2473 5815,2473 5815,2521 5807,2521 5767,2521 5767,2497 v2(5779,2497) ; v1(5783,1997) 5783,2029 5883,2029 5883,2205 5707,2205 5707,2037 5875,2037 5875,2197 5715,2197 5715,2045 5867,2045 5867,2189 5723,2189 5723,2053 5859,2053 5859,2181 5731,2181 5731,2061 5851,2061 5851,2173 5739,2173 5739,2069 5843,2069 5843,2165 5747,2165 5747,2077 5835,2077 5835,2157 5755,2157 5755,2085 5827,2085 5827,2149 5763,2149 5763,2093 5819,2093 5819,2141 5811,2141 5771,2141 5771,2117 v2(5783,2117) ; v1(5787,1621) 5787,1653 5887,1653 5887,1829 5711,1829 5711,1661 5879,1661 5879,1821 5719,1821 5719,1669 5871,1669 5871,1813 5727,1813 5727,1677 5863,1677 5863,1805 5735,1805 5735,1685 5855,1685 5855,1797 5743,1797 5743,1693 5847,1693 5847,1789 5751,1789 5751,1701 5839,1701 5839,1781 5759,1781 5759,1709 5831,1709 5831,1773 5767,1773 5767,1717 5823,1717 5823,1765 5815,1765 5775,1765 5775,1741 v2(5787,1741) ; v1(6063,2781) 6063,2989 6231,2989 6231,2821 6071,2821 6071,2981 6223,2981 6223,2829 6079,2829 6079,2969 6079,2973 6215,2973 6215,2837 6087,2837 6087,2965 6207,2965 6207,2845 6095,2845 6095,2957 6199,2957 6199,2853 6103,2853 6103,2949 6191,2949 6191,2861 6111,2861 6111,2941 6183,2941 6183,2869 6119,2869 6119,2933 6175,2933 6175,2881 6175,2877 6127,2877 6127,2889 6127,2901 ; v1(6427,2777) 6427,2985 6595,2985 6595,2817 6435,2817 6435,2977 6587,2977 6587,2825 6443,2825 6443,2965 6443,2969 6579,2969 6579,2833 6451,2833 6451,2961 6571,2961 6571,2841 6459,2841 6459,2953 6563,2953 6563,2849 6467,2849 6467,2945 6555,2945 6555,2857 6475,2857 6475,2937 6547,2937 6547,2865 6483,2865 6483,2929 6539,2929 6539,2877 6539,2873 6491,2873 6491,2885 6491,2897 ; 6127,2901 v2@6135,2901 ; 6127,2901 v2@6135,2901 ; 6127,2901 v2@6135,2901 ; 6491,2897 v2@6499,2897 ; 6491,2897 v2@6499,2897 ; 6491,2897 v2@6499,2897
  Mid-Layer 3 w5: v3(3863,3316) 3863,3296 3808,3296 3808,3441 3953,3441 3953,3286 3798,3286 3798,3451 3963,3451 3963,3276 3788,3276 3788,3461 3973,3461 3973,3266 3778,3266 3778,3471 3983,3471 3983,3256 3768,3256 3768,3481 3993,3481 3993,3246 3758,3246 3758,3491 4003,3491 4003,3236 3748,3236 3748,3501 4013,3501 4013,3226 3873,3226 3863,3216 3863,3201 3948,3116 ; v3(3868,3951) 3868,3931 3813,3931 3813,4076 3958,4076 3958,3921 3803,3921 3803,4086 3968,4086 3968,3911 3793,3911 3793,4096 3978,4096 3978,3901 3783,3901 3783,4106 3988,4106 3988,3891 3773,3891 3773,4116 3998,4116 3998,3881 3763,3881 3763,4126 4008,4126 4008,3871 3753,3871 3753,4136 4018,4136 4018,3861 3878,3861 3868,3851 3868,3836 3953,3751 ; v3(3868,4546) 3868,4526 3813,4526 3813,4671 3958,4671 3958,4516 3803,4516 3803,4681 3968,4681 3968,4506 3793,4506 3793,4691 3978,4691 3978,4496 3783,4496 3783,4701 3988,4701 3988,4486 3773,4486 3773,4711 3998,4711 3998,4476 3763,4476 3763,4721 4008,4721 4008,4466 3753,4466 3753,4731 4018,4731 4018,4456 3878,4456 3868,4446 3868,4431 3953,4346 ; v3(4438,3316) 4438,3296 4383,3296 4383,3441 4528,3441 4528,3286 4373,3286 4373,3451 4538,3451 4538,3276 4363,3276 4363,3461 4548,3461 4548,3266 4353,3266 4353,3471 4558,3471 4558,3256 4343,3256 4343,3481 4568,3481 4568,3246 4333,3246 4333,3491 4578,3491 4578,3236 4323,3236 4323,3501 4588,3501 4588,3226 4473,3226 4458,3211 v3@4448,3211 ; v3(4443,3951) 4443,3931 4388,3931 4388,4076 4533,4076 4533,3921 4378,3921 4378,4086 4543,4086 4543,3911 4368,3911 4368,4096 4553,4096 4553,3901 4358,3901 4358,4106 4563,4106 4563,3891 4348,3891 4348,4116 4573,4116 4573,3881 4338,3881 4338,4126 4583,4126 4583,3871 4328,3871 4328,4136 4593,4136 4593,3861 4478,3861 4463,3846 v3@4453,3846 ; v3(4443,4546) 4443,4526 4388,4526 4388,4671 4533,4671 4533,4516 4378,4516 4378,4681 4543,4681 4543,4506 4368,4506 4368,4691 4553,4691 4553,4496 4358,4496 4358,4701 4563,4701 4563,4486 4348,4486 4348,4711 4573,4711 4573,4476 4338,4476 4338,4721 4583,4721 4583,4466 4328,4466 4328,4731 4593,4731 4593,4456 4478,4456 4463,4441 v3@4453,4441
  Mid-Layer 3 w20: 4293,3516 4293,3206 4363,3206 ; 4293,3521 4608,3521 4608,3206 4483,3206
  Mid-Layer 4 w4: v2(2165,3756) 2153,3768 2125,3768 2053,3768 2053,3944 2221,3944 2221,3776 2061,3776 2061,3936 2213,3936 2213,3784 2069,3784 2069,3924 2069,3928 2205,3928 2205,3792 2077,3792 2077,3920 2197,3920 2197,3800 2085,3800 2085,3912 2189,3912 2189,3808 2093,3808 2093,3904 2181,3904 2181,3816 2101,3816 2101,3896 2173,3896 2173,3824 2109,3824 2109,3888 2165,3888 2165,3836 2165,3832 2117,3832 2117,3844 2117,3856 ; v1(6135,2381) 6135,2413 6235,2413 6235,2589 6059,2589 6059,2421 6227,2421 6227,2581 6067,2581 6067,2429 6219,2429 6219,2573 6075,2573 6075,2437 6211,2437 6211,2565 6083,2565 6083,2445 6203,2445 6203,2557 6091,2557 6091,2453 6195,2453 6195,2549 6099,2549 6099,2461 6187,2461 6187,2541 6107,2541 6107,2469 6179,2469 6179,2533 6115,2533 6115,2477 6171,2477 6171,2525 6163,2525 6123,2525 6123,2501 v2(6135,2501) ; v1(6139,1997) 6139,2029 6239,2029 6239,2205 6063,2205 6063,2037 6231,2037 6231,2197 6071,2197 6071,2045 6223,2045 6223,2189 6079,2189 6079,2053 6215,2053 6215,2181 6087,2181 6087,2061 6207,2061 6207,2173 6095,2173 6095,2069 6199,2069 6199,2165 6103,2165 6103,2077 6191,2077 6191,2157 6111,2157 6111,2085 6183,2085 6183,2149 6119,2149 6119,2093 6175,2093 6175,2141 6167,2141 6127,2141 6127,2117 v2(6139,2117) ; v1(6139,2781) 6139,2813 6239,2813 6239,2989 6063,2989 6063,2821 6231,2821 6231,2981 6071,2981 6071,2829 6223,2829 6223,2973 6079,2973 6079,2837 6215,2837 6215,2965 6087,2965 6087,2845 6207,2845 6207,2957 6095,2957 6095,2853 6199,2853 6199,2949 6103,2949 6103,2861 6191,2861 6191,2941 6111,2941 6111,2869 6183,2869 6183,2933 6119,2933 6119,2877 6175,2877 6175,2925 6167,2925 6127,2925 6127,2901 v2(6139,2901) ; v1(6143,1621) 6143,1653 6243,1653 6243,1829 6067,1829 6067,1661 6235,1661 6235,1821 6075,1821 6075,1669 6227,1669 6227,1813 6083,1813 6083,1677 6219,1677 6219,1805 6091,1805 6091,1685 6211,1685 6211,1797 6099,1797 6099,1693 6203,1693 6203,1789 6107,1789 6107,1701 6195,1701 6195,1781 6115,1781 6115,1709 6187,1709 6187,1773 6123,1773 6123,1717 6179,1717 6179,1765 6171,1765 6131,1765 6131,1741 v2(6143,1741) ; 6423,3161 6423,3369 6591,3369 6591,3201 6431,3201 6431,3361 6583,3361 6583,3209 6439,3209 6439,3349 6439,3353 6575,3353 6575,3217 6447,3217 6447,3345 6567,3345 6567,3225 6455,3225 6455,3337 6559,3337 6559,3233 6463,3233 6463,3329 6551,3329 6551,3241 6471,3241 6471,3321 6543,3321 6543,3249 6479,3249 6479,3313 6535,3313 6535,3261 6535,3257 6487,3257 6487,3269 6487,3281 ; 2117,3856 v2@2125,3856 ; 2117,3856 v2@2125,3856 ; 2117,3856 v2@2125,3856 ; 6487,3281 v2@6495,3281 ; 6487,3281 v2@6495,3281 ; 6487,3281 v2@6495,3281
  Mid-Layer 4 w5: v3@4448,3211 4438,3211 4423,3226 4313,3226 4313,3501 4588,3501 4588,3236 4323,3236 4323,3491 4578,3491 4578,3246 4333,3246 4333,3481 4568,3481 4568,3256 4343,3256 4343,3471 4558,3471 4558,3266 4353,3266 4353,3461 4548,3461 4548,3276 4363,3276 4363,3451 4538,3451 4538,3291 4538,3286 4373,3286 4373,3441 4528,3441 4528,3296 4468,3296 v3(4468,3316) ; v3@4453,3846 4443,3846 4428,3861 4318,3861 4318,4136 4593,4136 4593,3871 4328,3871 4328,4126 4583,4126 4583,3881 4338,3881 4338,4116 4573,4116 4573,3891 4348,3891 4348,4106 4563,4106 4563,3901 4358,3901 4358,4096 4553,4096 4553,3911 4368,3911 4368,4086 4543,4086 4543,3926 4543,3921 4378,3921 4378,4076 4533,4076 4533,3931 4473,3931 v3(4473,3951) ; v3@4453,4441 4443,4441 4428,4456 4318,4456 4318,4731 4593,4731 4593,4466 4328,4466 4328,4721 4583,4721 4583,4476 4338,4476 4338,4711 4573,4711 4573,4486 4348,4486 4348,4701 4563,4701 4563,4496 4358,4496 4358,4691 4553,4691 4553,4506 4368,4506 4368,4681 4543,4681 4543,4521 4543,4516 4378,4516 4378,4671 4533,4671 4533,4526 4473,4526 v3(4473,4546)
  Bottom Layer w4: v1(1773,3336) v2(1773,3472) ; v1(1801,4140) v2(1801,4276) ; v1(1809,4564) v2(1809,4700) ; v2(2129,3856) 2117,3856 2117,3880 2157,3880 2165,3880 2165,3832 2109,3832 2109,3888 2173,3888 2173,3824 2101,3824 2101,3896 2181,3896 2181,3816 2093,3816 2093,3904 2189,3904 2189,3808 2085,3808 2085,3912 2197,3912 2197,3800 2077,3800 2077,3920 2205,3920 2205,3792 2069,3792 2069,3928 2213,3928 2213,3784 2061,3784 2061,3936 2221,3936 2221,3776 2053,3776 2053,3944 2229,3944 v1(2229,3728) ; v1(2189,4140) v2(2189,4276) ; v1(2189,4564) v2(2189,4700) ; v1(2453,4140) v2(2453,4276) ; v1(2453,4564) v2(2453,4700) ; 6499,3161 6499,3193 6599,3193 6599,3369 6423,3369 6423,3201 6591,3201 6591,3361 6431,3361 6431,3209 6583,3209 6583,3353 6439,3353 6439,3217 6575,3217 6575,3345 6447,3345 6447,3225 6567,3225 6567,3337 6455,3337 6455,3233 6559,3233 6559,3329 6463,3329 6463,3241 6551,3241 6551,3321 6471,3321 6471,3249 6543,3249 6543,3313 6479,3313 6479,3257 6535,3257 6535,3305 6527,3305 6487,3305 6487,3281 v2(6499,3281) ; v1(6503,1621) 6503,1653 6603,1653 6603,1829 6427,1829 6427,1661 6595,1661 6595,1821 6435,1821 6435,1669 6587,1669 6587,1813 6443,1813 6443,1677 6579,1677 6579,1805 6451,1805 6451,1685 6571,1685 6571,1797 6459,1797 6459,1693 6563,1693 6563,1789 6467,1789 6467,1701 6555,1701 6555,1781 6475,1781 6475,1709 6547,1709 6547,1773 6483,1773 6483,1717 6539,1717 6539,1765 6531,1765 6491,1765 6491,1741 v2(6503,1741) ; v1(6503,1997) 6503,2029 6603,2029 6603,2205 6427,2205 6427,2037 6595,2037 6595,2197 6435,2197 6435,2045 6587,2045 6587,2189 6443,2189 6443,2053 6579,2053 6579,2181 6451,2181 6451,2061 6571,2061 6571,2173 6459,2173 6459,2069 6563,2069 6563,2165 6467,2165 6467,2077 6555,2077 6555,2157 6475,2157 6475,2085 6547,2085 6547,2149 6483,2149 6483,2093 6539,2093 6539,2141 6531,2141 6491,2141 6491,2117 v2(6503,2117) ; v1(6503,2381) 6503,2413 6603,2413 6603,2589 6427,2589 6427,2421 6595,2421 6595,2581 6435,2581 6435,2429 6587,2429 6587,2573 6443,2573 6443,2437 6579,2437 6579,2565 6451,2565 6451,2445 6571,2445 6571,2557 6459,2557 6459,2453 6563,2453 6563,2549 6467,2549 6467,2461 6555,2461 6555,2541 6475,2541 6475,2469 6547,2469 6547,2533 6483,2533 6483,2477 6539,2477 6539,2525 6531,2525 6491,2525 6491,2501 v2(6503,2501) ; v1(6503,2777) 6503,2809 6603,2809 6603,2985 6427,2985 6427,2817 6595,2817 6595,2977 6435,2977 6435,2825 6587,2825 6587,2969 6443,2969 6443,2833 6579,2833 6579,2961 6451,2961 6451,2841 6571,2841 6571,2953 6459,2953 6459,2849 6563,2849 6563,2945 6467,2945 6467,2857 6555,2857 6555,2937 6475,2937 6475,2865 6547,2865 6547,2929 6483,2929 6483,2873 6539,2873 6539,2921 6531,2921 6491,2921 6491,2897 v2(6503,2897)
  Bottom Layer w5: v2(3273,3106) 3278,3111 ; v2(3278,3741) 3283,3746 ; v2(3278,4336) 3283,4341 ; v3(4468,3316) 4468,3296 4383,3296 4383,3441 4528,3441 4528,3286 4373,3286 4373,3451 4538,3451 4538,3276 4363,3276 4363,3461 4548,3461 4548,3266 4353,3266 4353,3471 4558,3471 4558,3256 4343,3256 4343,3481 4568,3481 4568,3246 4333,3246 4333,3491 4578,3491 4578,3236 4323,3236 4323,3501 4588,3501 4588,3226 4528,3226 4498,3226 4488,3216 4488,3176 4488,3151 4528,3111 ; v3(4473,3951) 4473,3931 4388,3931 4388,4076 4533,4076 4533,3921 4378,3921 4378,4086 4543,4086 4543,3911 4368,3911 4368,4096 4553,4096 4553,3901 4358,3901 4358,4106 4563,4106 4563,3891 4348,3891 4348,4116 4573,4116 4573,3881 4338,3881 4338,4126 4583,4126 4583,3871 4328,3871 4328,4136 4593,4136 4593,3861 4533,3861 4503,3861 4493,3851 4493,3811 4493,3786 4533,3746 ; v3(4473,4546) 4473,4526 4388,4526 4388,4671 4533,4671 4533,4516 4378,4516 4378,4681 4543,4681 4543,4506 4368,4506 4368,4691 4553,4691 4553,4496 4358,4496 4358,4701 4563,4701 4563,4486 4348,4486 4348,4711 4573,4711 4573,4476 4338,4476 4338,4721 4583,4721 4583,4466 4328,4466 4328,4731 4593,4731 4593,4456 4533,4456 4503,4456 4493,4446 4493,4406 4493,4381 4533,4341
  Bottom Layer w75: 3768,3471 3768,3251 3838,3251 ; 3768,3476 3988,3476 3988,3251 3923,3251
  other v3: 3838,3196 4448,3206 3843,3841 4453,3841 3828,4436 4453,4436

## Silkscreen, mask and mechanical layers (free items; w line width, h text height)
Top Overlay:
  text "4layers" at 3783,4631 h30
  text "6layers" at 4368,4631 h30
  text "2layers" at 3208,4626 h30
  text "5.8uH" at 3828,4581 h30
  text "13uH" at 4403,4581 h30
  text "1.4uH" at 3248,4576 h30
  text "1layers" at 1717,4504 h30
  text "1layers" at 2093,4504 h30
  text "1layers" at 2365,4504 h30
  text "200nH(rc)" at 1713,4460 h30
  text "200nH(rc)" at 2093,4460 h30
  text "200nH(rc)" at 2365,4460 h30
  text "1layers" at 1721,4080 h30
  text "1layers" at 2113,4080 h30
  text "1layers" at 2373,4080 h30
  text "200nH(ro)" at 1717,4036 h30
  text "200nH(ro)" at 2109,4036 h30
  text "200nH(ro)" at 2405,4036 h30
  text "4layers" at 3783,4036 h30
  text "6layers" at 4368,4036 h30
  text "2layers" at 3208,4031 h30
  text "5.8uH" at 3828,3986 h30
  text "13uH" at 4403,3986 h30
  text "1.4uH" at 3248,3981 h30
  text "6layers" at 2049,3656 h30
  text "4layers" at 1693,3652 h30
  text "7.2uH" at 2073,3612 h30
  text "3.2uH(T123)" at 1665,3608 h30
  text "4layers" at 3778,3401 h30
  text "6layers" at 4363,3401 h30
  text "2layers" at 3203,3396 h30
  text "5.8uH" at 3823,3351 h30
  text "13uH" at 4398,3351 h30
  text "1.4uH" at 3243,3346 h30
  text "2layers" at 6402,3341 h30
  text "800nH(4B)" at 6387,3301 h30
  text "1layers" at 1693,3276 h30
  text "200nH" at 1689,3232 h30
  text "2layers" at 6059,2717 h30
  text "2layers" at 6415,2709 h30
  text "800nH(34)" at 6063,2665 h30
  text "800nH(3B)" at 6415,2661 h30
  text "2layers" at 6047,2317 h30
  text "2layers" at 6415,2317 h30
  text "2layers" at 5691,2313 h30
  text "800nH(24)" at 6044,2266 h30
  text "800nH(2B)" at 6412,2266 h30
  text "800nH(23)" at 5688,2262 h30
  text "2layers" at 5339,1933 h30
  text "2layers" at 5695,1933 h30
  text "2layers" at 6051,1933 h30
  text "2layers" at 6415,1933 h30
  text "800nH(12)" at 5336,1882 h30
  text "800nH(13)" at 5692,1882 h30
  text "800nH(14)" at 6048,1882 h30
  text "800nH(1B)" at 6412,1882 h30
  text "2layers" at 4975,1557 h30
  text "2layers" at 5335,1557 h30
  text "2layers" at 5699,1557 h30
  text "2layers" at 6055,1557 h30
  text "2layers" at 6415,1557 h30
  text "800nH(T1)" at 4972,1506 h30
  text "800nH(T2)" at 5332,1506 h30
  text "800nH(T3)" at 5696,1506 h30
  text "800nH(T4)" at 6052,1506 h30
  text "800nH(TB)" at 6412,1506 h30